# Altium PCB PCB1.PcbDoc (part 3 of 3)
Units mil, origin at the board's own origin, x right, y up, seen from the top; angles counter-clockwise.
Board outline 2860 x 1380 mil, 4 copper layers (L1, L2, L3, L4), stack 61.583 mil thick; 101 components, 94 nets, 397 pads, 115 vias.
Unrouted connection lines stored in the file: 102.
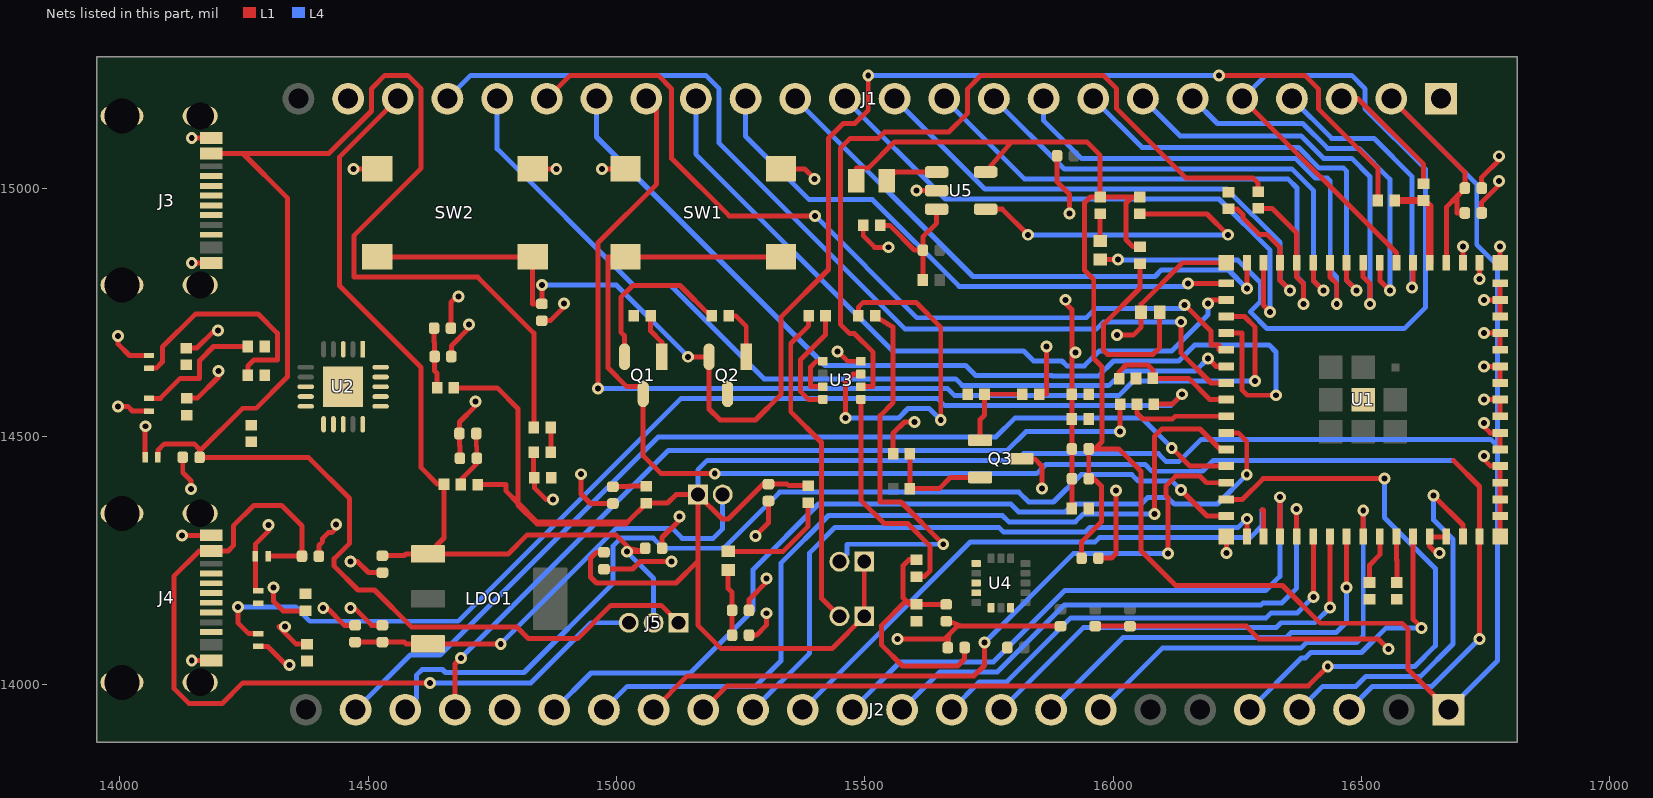
[diagram p4: the nets of this part, all layers, seen from the top]

## Via types
v1: diameter 24, hole 12, L1 to L4, 114 vias
v2: diameter 24/24 (per signal layer), hole 12, L1 to L4, 1 vias

## Nets (pads, with @x,y where several pads share a name; then routed paths per layer and width w, separated by ;. In a path a pad name is that pad's centre, name@x,y a point inside that pad or via, vN(x,y) a via of type N, cw(c..) or ccw(c..) an arc to the next point about the centre after c; other vN are vias at no path point) (continued)
+3V3: C4.2 C5.2 C10.2 C11.2 C28.2 C29.2 C30.2 H1.1 H2.1 H3.1 J1.2 J2.1 L1.1 R2.2 R3.2 R20.1 R25.2 R26.2 R27.2 R32.2 U1.3 U5.5 | length 8746.2
  L1 w10: R3.2@14673.02,14598 14760,14598 14802,14556 14802,14366 ; R2.2@14721,14403 14778,14403 14778,14390 14802,14366 ; C4.2@14975,14266.93 14960,14266.93 14948,14254.93 14948,14217 14960,14205 15120,14205 15164,14249 ; R27.2@15386.07,14401.01 15346.99,14401.01 15344,14404 C5.2@15306.07,14404 15295,14404 15225,14334 15213,14334 H1.1@15164,14383 ; L1.1@15482.98,15015.01 15482.98,15040 15507,15040 15560,15093 15796,15093 ; H2.1@15499,14248 H3.1@15499,14138 15434,14073 15211,14073 15164,14120 15164,14249 ; U5.5@15743.41,15032.41 15796,15093 ; C28.2@15936.56,14255.01 15936.56,14287.92 15976.64,14328 15976.64,14400 15961.63,14415.01 C29.2@15950.93,14415.01 C30.2@15950.93,14475.01 15963.01,14475.01 ; R32.2@16053.49,14982.02 16038.02,14982.02 ; R25.2@16054,14882.02 16040,14882.02 16026,14896.02 16026,14970 16038.02,14982.02 ; J1.2@16560,15180 16708.07,15031.93 C10.2@16708.07,15000 16708.07,14998.82 16692.21,14982.96 ; U1.3@16670.73,14849.73 16670.73,14961.48 16692.21,14982.96 ; J2.1@16675,13950 16594,14031 16594,14112 16582,14124 16417,14124 16341,14200 16126,14200 16056,14270 16056,14430 16010.99,14475.01 15963.01,14475.01 ; C11.2@16708.07,14950 16692.21,14950 16692.21,14982.96 ; 14802,14366 14840,14328 15023,14328 ; 14802,14366 14802,14362 14840,14324 15019,14324 15023,14328 ; 15023,14328 15060,14365 R20.1@15060,14365.99 15103,14365.99 15120.01,14383 H1.1@15164,14383 ; 15164,14249 H1.1@15164,14383 ; 15796,15093 15947,15093 15974,15066 R26.2@15974,14982.02 ; 15963.01,14475.01 15978,14490 15978,14639.89 15961,14656.89 15961,14816 15942,14835 15942,14970 15954.02,14982.02 R26.2@15974,14982.02 ; R26.2@15974,14982.02 16038.02,14982.02
  L4 w10: H1.1@15164,14383 15164,14433 15183,14452 15806,14452 15819.25,14465.25 16091,14465.25 16106.25,14450 16133.08,14450 16177.36,14494.28 16760,14494.28 16774,14480.28 ; J1.2@16560,15180 16732,15008 16732,14886 16774,14844 16774,14480.28 ; J2.1@16675,13950 16774,14049 16774,14480.28
"+3V3 FTDI": C6.2 C7.2 R3.1 R6.2 U2.10 U2.20 | length 122.5
  L1 w10: C6.2@14633.07,14718 14633.07,14690 14634.07,14689 C7.2@14634.07,14661 14634.07,14631.93 14639,14627 R3.1@14639,14598
+3V3-REG: C13.2 C14.2 H1.2 LDO1.3 | length 923.1
  L1 w10: C14.2@14474,14086.07 C13.2@14529,14086.07 14573,14086.07 14576.62,14082.45 LDO1.3@14620.97,14082.45 v1(14767.25,14082.45)
  L4 w10: v1(14767.25,14082.45) 15000,14315.2 15112.27,14315.2 15132.46,14295 15195,14295 15214,14314 H1.2@15214,14383
+5V: C8.2 C12.1 J1.22 J5.2 LDO1.1 R1.2 | length 1840.6
  L1 w10: C12.1@14529,14259.93 14573,14259.93 14576.62,14263.55 LDO1.1@14620.97,14263.55 ; J1.22@14560,15180 14443,15063 14443,14802.85 14607,14638.85 14607,14437 14640,14404 R1.2@14652.99,14404 14652.99,14295.58 LDO1.1@14620.97,14263.55 ; v1(15021,14268) C8.2@15058.07,14268 ; C8.2@15058.07,14275 C8.2@15058.07,14268 ; LDO1.1@14620.97,14263.55 14782,14263.55 14820.45,14302 14999,14302 15026,14275 15056.61,14268.32 C8.2@15058.07,14268
  L4 w10: v1(15021,14268) 15075,14214 J5.2@15075,14125
"+5V VBUS1": C3.2 D1.1 J3.A4B9 J5.1 R10.2 | length 3689.1
  L1 w10: D1.1@14076.8,14458 14076.8,14471.8 14090,14485 14150,14485 14160.93,14474.07 14160.93,14469.93 ; J3.A4B9@14184.84,15069.49 14248.51,15069.49 ; R10.2@14833.99,14518 14833.99,14708.01 14721.17,14820.83 14472,14820.83 14472,14905 14607,15040 14607,15200 14580,15227 14534,15227 14507,15200 14507,15155.29 14421.2,15069.49 14248.51,15069.49 ; J5.1@15125,14125 15090,14160 14989,14160 14922,14093 14823.02,14093 14800.02,14116 14588,14116 14513,14191 14480,14191 14432,14239 14432,14254 14463,14285 14463,14375 14380,14458 C3.2@14160.93,14458 14160.93,14469.93 ; 14160.93,14469.93 14247.79,14556.79 14274.79,14556.79 14337.64,14619.64 14337.64,14980.36 14248.51,15069.49
"+5V VBUS2": C9.2 D4.1 J4.A4B9 J5.3 | length 1708.6
  L1 w10: D4.1@14298.8,14259 C9.2@14367.07,14259 14367.07,14320 14326.07,14361 14270,14361 14229,14320 14229,14280 14218.49,14269.49 J4.A4B9@14184.84,14269.49 14160,14269.49 14109,14218.49 14109,13993 14140,13962 14206,13962 14248,14004 v1(14625,14004)
  L4 w10: v1(14625,14004) 14828,14004 14949,14125 J5.3@15025,14125
BOT_GPIO0: C16.2 Q2.2 R19.1 SW2.1 SW2.2 | length 3061.6
  L1 w10: SW2.2@14518.5,14861.42 SW2.1@14831.5,14861.42 14831.5,14766.93 C16.2@14850,14766.93 v1(14850,14805) ; v1(15144.58,14660.42) Q2.2@15186.6,14660.42 15186.6,14555.4 15209,14533 15280,14533 15331,14584 15331,14740 15427,14836 15427,15100 15457,15130 15480,15130 15507,15157 v1(15507,15227) ; v1(16213,15227) 16386,15227 16413,15200 16413,15160 16532.99,15040.01 R19.1@16532.99,14975
  L4 w10: v1(14850,14805) 15000,14805 v1(15144.58,14660.42) ; v1(15507,15227) v1(16213,15227)
CHIP_PU: J2.3 Q1.3 SW1.1 SW1.2 U1.45 | length 3169.8
  L1 w10: v1(15198,14425) 15090,14425 15054,14461 Q1.3@15054,14585.58 15054,14601 15020,14601 14983,14638 14983,14861.42 SW1.2@15018.5,14861.42 SW1.1@15331.5,14861.42 ; 16685,14452 16737.66,14399.34 U1.45@16737.66,14298.55 v1(16737.66,14092.66)
  L4 w10: v1(15198,14425) 15846,14425 15865,14444 16064,14444 16078,14430 16180,14430 16202,14452 16685,14452 ; J2.3@16475,13950 16522,13997 16642,13997 v1(16737.66,14092.66)
"CON1 USB N": D2.1 J3.A7 J3.B7 R4.1 | length 475.4
  L1 w10: D2.1@14059,14637.41 14073.41,14637.41 14086,14650 14086,14680 14153,14747 14278.64,14747 14317.64,14708 14317.64,14654 14270,14654 14257.99,14641.99 R4.1@14257.99,14623
"CON1 USB P": D3.1 J3.A6 J3.B6 R5.1 | length 263.2
  L1 w10: D3.1@14059,14576.8 14082,14576.8 14122.2,14617 14161,14617 14161,14653 14189,14681 R5.1@14257.99,14681
"CON2 USB N": D5.1 J4.A7 J4.B7 R21.2
"CON2 USB P": D6.1 J4.A6 J4.B6 R22.2 | length 2261.3
  L1 w10: v1(14238,14157) 14238,14125 14260,14103 D6.1@14279,14103 ; R22.2@16082,14565 16119,14565 v1(16139,14585)
  L4 w10: v1(14238,14157) 14354,14157 14383,14128 14681.51,14128 15129.66,14576.15 15647,14576.15 15661,14562.15 16116.15,14562.15 v1(16139,14585)
"CON ESP USB N": J2.20 R23.2
"CON ESP USB P": J2.21 R24.2 | length 1679.9
  L1 w10: J2.21@14675,13950 14675,14042 v1(14687,14054) ; v1(16014,14510) R24.2@16014,14565
  L4 w10: v1(14687,14054) 15105,14472 15787,14472 15825,14510 v1(16014,14510)
CONN_GPIO0: J1.3 R17.1 | length 258.7
  L1 w10: J1.3@16460,15180 16493,15180 16625,15048 R17.1@16625,15009.02
CS: R28.2 U3.2 | length 715.1
  L1 w10: v1(15461,14537) 15461,14610 15476.8,14625.8 U3.2@15492.19,14625.8 ; R28.2@15486.99,14743 15486.99,14760 15496.99,14770 15603,14770 15653,14720 v1(15653,14533)
  L4 w10: v1(15461,14537) 15568,14537 15587.15,14556.15 15629.85,14556.15 v1(15653,14533)
"DTR FTDI": R14.1 U2.18
"ESP USB N": R21.1 R23.1 U1.23 | length 274.5
  L1 w10: R23.1@16012,14616 16012,14630 16026,14644 16070,14644 16080.01,14633.99 R21.1@16080.01,14617 16152,14617 16194.86,14574.14 U1.23@16227.82,14574.14
"ESP USB P": R22.1 R24.1 U1.24 | length 205.1
  L1 w10: R24.1@16048.02,14565 16048.02,14546.98 16060,14535 16119.28,14535 16124.96,14540.68 U1.24@16227.82,14540.68
"FTDI USB N": R4.2 U2.9
"FTDI USB P": R5.2 U2.8
GND: C1.2 C2.1 C3.1 C4.1 C5.1 C6.1 C7.1 C8.1 C9.1 C10.1 C11.1 C12.2 C13.1 C14.1 C15.1 C16.1 C17.1 C18.1 C19.1 C20.1 C21.1 C22.1 C23.1 C25.1 C27.1 C28.1 C29.1 C30.1 D1.2 D2.2 D3.2 D4.2 D5.2 D6.2 D7.1 J1.1 J1.23 J3.A1B12 J3.B1A12 J3.S1 J3.S2 J3.S3 J3.S4 J4.A1B12 J4.B1A12 J4.S1 J4.S2 J4.S3 J4.S4 Q3.3 R7.1 R8.2 R9.2 R11.2 R12.2 R13.2 R34.1 R37.1 R39.1 R41.1 R42.1 R43.1 SW1.3 SW1.4 SW2.3 SW2.4 U1.1 U1.2 U1.42 U1.43 U1.46 U1.47 U1.48 U1.49 U1.50 U1.51 U1.52 U1.53 U1.54 U1.55 U1.56 U1.57 U1.58 U1.59 U1.60 U1.61 U1.62 U1.63 U1.64 U1.65 U2.3 U2.13 U2.21 U3.1 U4.6 U4.8 U5.2 | length 6215.5
  L1 w10: v1(13996.44,14560) 14017.13,14560 14025.93,14551.2 D3.2@14059,14551.2 ; v1(13996.44,14702.21) 13996.44,14686.56 14020,14663 D2.2@14059,14663 ; D1.2@14051.2,14458 14051.2,14520.56 v1(14052,14520.56) ; v1(14125.2,14300.98) J4.A1B12@14184.84,14300.98 ; C3.1@14127.07,14458 14127.07,14427.42 14144,14410.49 v1(14144,14393.86) ; R9.2@14134,14678 14155.55,14678 14190.54,14712.99 v1(14198.14,14712.99) ; R8.2@14135,14577.01 14156.55,14577.01 14199.14,14619.6 v1(14199.14,14632) ; v1(14145.2,14049.02) J4.B1A12@14184.84,14049.02 ; v1(14145.2,14849.02) J3.B1A12@14184.84,14849.02 ; v1(14145.2,15100.98) J3.A1B12@14184.84,15100.98 ; D6.2@14279,14077.41 14297.77,14077.41 14335.18,14040 v1(14341.56,14040) ; D5.2@14279,14189.59 14273.2,14189.59 D4.2@14273.2,14259 14273.2,14283.07 14300,14309.87 v1(14300,14321.56) ; v1(14309.86,14196) 14309.86,14168.08 14328.95,14148.99 R13.2@14374,14148.99 ; v1(14332.86,14117) 14320.46,14117 14355.45,14082.01 R12.2@14377,14082.01 ; C9.1@14400.93,14259 14400.93,14280.51 14408.68,14288.26 14408.68,14294.97 14420,14306.29 14426.71,14306.29 14436,14315.58 v1(14436,14323.14) ; v1(14409.86,14155) 14417.42,14155 14452.49,14119.93 C14.1@14474,14119.93 ; v1(14464.86,14155) 14472.42,14155 14507.49,14119.93 C13.1@14529,14119.93 ; v1(14464.86,14248) 14478.99,14248 14500.92,14226.07 C12.2@14529,14226.07 ; v1(14470.99,15038.58) SW2.4@14518.5,15038.58 ; C6.1@14666.93,14718 14666.93,14770 14679.07,14782.14 v1(14682,14782.14) ; C7.1@14667.93,14661 14667.93,14682.51 14703,14717.58 v1(14703,14725.14) ; C2.1@14685.07,14456 14685.07,14480.93 14684.07,14481.93 C1.2@14684.07,14506 14684.07,14529.08 14716,14561.01 v1(14716,14570.14) ; SW2.3@14831.5,15038.58 v1(14879.01,15038.58) ; R11.2@14833.99,14468 14833,14468 14833,14417 R7.1@14834.99,14417 14834.99,14396.46 14858.59,14372.86 v1(14872,14372.86) ; C16.1@14850,14733.07 14867.21,14733.07 14894.14,14760 v1(14894.14,14768) ; v1(14928.86,14424) 14928.86,14384.16 14947.95,14365.07 C15.1@14993,14365.07 ; v1(14970.99,15038.58) SW1.4@15018.5,15038.58 ; C4.1@14975,14233.07 15032.58,14233.07 15047.51,14248 v1(15111.14,14248) ; C8.1@15091.93,14275 15091.93,14296.51 15127,14331.58 v1(15127,14339.14) ; C18.1@15266.93,14100 15282,14100 15302,14120 v1(15302,14144.14) ; C17.1@15266.93,14150 15266.93,14171.51 15302,14206.58 v1(15302,14214.14) ; v1(15280,14300) 15306.07,14326.07 C5.1@15306.07,14370.14 ; SW1.3@15331.5,15038.58 15379.01,15038.58 v1(15399.01,15018.58) ; v1(15445.54,14671.39) 15465.54,14651.39 U3.1@15492.19,14651.39 ; R34.1@15496.99,14925.01 15496.99,14903.88 15520,14880.87 v1(15548,14880.87) ; R42.1@15556.99,14465.01 15556.99,14506.14 15580,14529.15 v1(15600,14529.15) ; v1(15565.86,14092) 15659.92,14092 15670.07,14102.15 ; v1(15603.77,14995.01) U5.2@15644.59,14995.01 ; C19.1@15664,14128.08 15670.07,14128.08 15696,14118.08 ; C20.1@15667.07,14075.01 15670.07,14102.15 ; Q3.3@15815.73,14455.01 15841.94,14455.01 15856.95,14440 v1(15856.95,14395.01) ; R43.1@15851.01,14585.01 15866,14585.01 v1(15866,14681.15) ; C22.1@15887.07,15065.01 15887.07,15012.43 15912,14987.5 v1(15912,14948.87) ; C23.1@15894,14118.08 15696,14118.08 ; v1(15904,14775.15) 15904,14768.22 15917.07,14755.15 v1@15917.07,14662.22 ; R37.1@15916.99,14355.01 R37.1@15917.07,14355.01 ; R39.1@15916.99,14535.01 15916.99,14513.01 15917.07,14512.93 ; R41.1@15916.99,14585.01 15916.99,14662.14 v1@15917.07,14662.22 ; C29.1@15917.07,14415.01 R37.1@15917.07,14355.01 ; v1(15924,14669.15) v1@15917.07,14662.22 ; C25.1@15964,14118.08 C27.1@16034,14118.08 16268.01,14118.08 16294.08,14092 16534.14,14092 v1(16554.14,14072) ; C28.1@15970.42,14255.01 15996.64,14255.01 16005.49,14263.86 v1(16005.49,14391.15) ; v1(16008,14703.89) 16040.19,14703.89 16056.3,14720 D7.1@16056.3,14750 16056.3,14766.3 16139.73,14849.73 U1.63@16227.82,14849.73 ; v1(16227.82,14265.8) U1.64@16227.82,14298.55 ; U1.42@16637.27,14298.55 U1.42@16637.27,14298 ; v1(16657.27,14265.8) 16650,14265.8 16637.27,14278.54 U1.42@16637.27,14298 ; U1.43@16670.73,14298.55 16670.73,14298 U1.42@16637.27,14298 ; U1.2@16704.2,14849.73 v1(16704.2,14882.48) ; v1(16737.66,14816.98) U1.1@16737.66,14849.73 ; C11.1@16741.93,14950 16741.93,14971.51 16777,15006.58 v1(16777,15014.14) ; C10.1@16741.93,15000 16741.93,15021.51 16777,15056.58 v1(16777,15064.14) ; v1(16746.25,14460.28) 16746.25,14454.03 16760,14440.28 U1.49@16779,14440.28 U1.48@16779,14406.82 U1.47@16779,14373.35 U1.46@16779,14339.89 U1.65@16779,14298.55 ; v1(16746.25,14527.21) 16746.25,14520 16759.04,14507.21 U1.51@16779,14507.21 U1.50@16779,14473.75 ; v1(16746.25,14574.14) U1.53@16779,14574.14 U1.52@16779,14540.68 ; v1(16746.25,14641.07) U1.55@16779,14641.07 U1.54@16779,14607.61 ; v1(16746.25,14708) U1.57@16779,14708 U1.56@16779,14674.54 ; v1(16746.25,14774.93) U1.59@16779,14774.93 ; U1.58@16779,14741.46 U1.59@16779,14774.93 ; U1.60@16779,14808.39 U1.59@16779,14774.93 ; U1.62@16779,14849.73 v1(16779,14882.48) ; 15670.07,14102.15 15685.99,14118.08 15696,14118.08 ; R37.1@15917.07,14355.01 15917.68,14355.01 15917.68,14415.4 15917.07,14416.01 C30.1@15917.07,14475.01 15917.07,14512.93 ; 15917.07,14512.93 v1@15917.07,14662.22
GPIO0: R17.2 R19.2 U1.4 | length 189
  L1 w15: R19.2@16567.01,14975 R17.2@16625,14975 16626.18,14975 16637.27,14963.91 U1.4@16637.27,14849.73
GPIO1: J1.4 U1.5 | length 580.1
  L1 w10: v1(16602,14800.22) 16603.8,14802.02 U1.5@16603.8,14849.73
  L4 w10: J1.4@16360,15180 16440,15100 16525,15100 16602,15023 v1(16602,14800.22)
GPIO2: J1.5 LED1.1 U1.6 | length 2020.7
  L1 w10: LED1.1@15974,14856.31 v1(16009.69,14856.31) ; J1.5@16260,15180 16570.34,14869.66 U1.6@16570.34,14849.73
  L4 w10: v1(16009.69,14856.31) 16011,14855 16251.16,14855 16296.16,14810 16296.16,14771 16276,14750.84 16309.84,14717 16586,14717 16629,14760 16629,15038 16507,15160 16507,15200 16480,15227 16307,15227 J1.5@16260,15180
GPIO3: J1.6 U1.7 | length 752.2
  L1 w10: U1.7@16536.87,14849.73 16536.87,14814.13 v1(16557,14794)
  L4 w10: J1.6@16160,15180 16210,15130 16381.72,15130 16431.72,15080 16495,15080 16557,15018 v1(16557,14794)
GPIO4: J1.7 U1.8 | length 866.5
  L1 w10: U1.8@16503.41,14849.73 16503.41,14821 16517.07,14807.34 v1(16517.07,14767)
  L4 w10: J1.7@16060,15180 16135,15105 16378.43,15105 16423.43,15060 16480,15060 16517.07,15022.93 v1(16517.07,14767)
GPIO5: J1.8 U1.9 | length 883
  L1 w10: U1.9@16469.94,14849.73 16469.94,14814.13 v1(16490.07,14794)
  L4 w10: J1.8@15960,15180 16058,15082 16373.15,15082 16415.15,15040 16464.21,15040 16470.07,15034.14 16470.07,14841.07 16470.14,14841 16470.14,14813.93 v1(16490.07,14794)
GPIO6: J1.9 U1.10 | length 1012.6
  L1 w10: U1.10@16436.48,14849.73 16436.48,14821 16450.14,14807.34 v1(16450.14,14767)
  L4 w10: J1.9@15860,15180 15860,15135.86 15935.86,15060 16366.86,15060 16406.86,15020 16431.21,15020 16437.07,15014.14 16437.07,14834.07 16450.14,14821 v1(16450.14,14767)
GPIO7: J1.10 U1.11 | length 993.4
  L1 w10: U1.11@16403.02,14849.73 16403.02,14814.13 v1(16423.14,14794)
  L4 w10: J1.10@15760,15180 15902,15038 16360.58,15038 16403.14,14995.44 16403.14,14814 v1(16423.14,14794)
GPIO8: J1.11 R35.1 U1.12 | length 1269.4
  L1 w10: R35.1@16292,14958.99 16320,14958.99 16369.55,14909.44 U1.12@16369.55,14849.73 16369.55,14821 16383.21,14807.34 v1(16383.21,14767)
  L4 w10: J1.11@15660,15180 15822,15018 16352.29,15018 16370.14,15000.15 16370.14,14821 16383.21,14807.93 v1(16383.21,14767)
GPIO9: J1.12 R36.1 U1.13 | length 1235.9
  L1 w10: R36.1@16232,14957.99 16250,14957.99 16261,14946.99 16261,14940 16294,14907 16309.09,14907 16336.09,14880 U1.13@16336.09,14849.73 16336.09,14814.13 v1(16356.21,14794)
  L4 w10: J1.12@15560,15180 15742,14998 16229,14998 16336.21,14890.79 16336.21,14814 v1(16356.21,14794)
GPIO10: J1.13 U1.14 | length 1211.6
  L1 w10: U1.14@16302.62,14849.73 16302.62,14764.13 v1(16316.16,14750.59)
  L4 w10: J1.13@15460,15180 15662,14978 16213,14978 16316.16,14874.84 v1(16316.16,14750.59)
GPIO11: J1.14 U1.15 | length 1129.8
  L1 w10: v1(16269.16,14797.95) U1.15@16269.16,14849.73
  L4 w10: J1.14@15360,15180 15717.85,14822.15 16084.15,14822.15 16097,14835 16232.11,14835 v1(16269.16,14797.95)
GPIO12: J1.15 U1.16 | length 1171.1
  L1 w10: v1(16151,14808) 16151.39,14808.39 U1.16@16227.82,14808.39
  L4 w10: J1.15@15260,15180 15260,15104.57 15388,14976.57 15515.51,14976.57 15689.94,14802.15 16145.15,14802.15 v1(16151,14808)
GPIO13: J1.16 U1.17 | length 1424.5
  L1 w10: v1(16191,14768) 16197.93,14774.93 U1.17@16227.82,14774.93
  L4 w10: J1.16@15160,15180 15160,15068.4 15556.4,14672 15820,14672 15840,14652 15897,14652 15906.85,14642.15 15942.15,14642.15 15972,14672 16118,14672 16191,14745 v1(16191,14768)
GPIO14: J1.17 U1.18 | length 2157.7
  L1 w10: v1(14963,14596.15) 14963,14890 15081,15008 15081,15159 J1.17@15060,15180 ; U1.18@16227.82,14741.46 16264.54,14741.46 16286,14720 v1(16286,14612)
  L4 w10: v1(14963,14596.15) 15667,14596.15 15681,14582.15 16011,14582.15 16040.85,14612 v1(16286,14612)
GPIO15: J1.18 U1.19 | length 1981.3
  L1 w10: U1.19@16227.82,14708 16259,14708 16259,14594 16270,14583 v1(16328,14583)
  L4 w10: J1.18@14960,15180 14960,15103 15420,14643 15703,14643 15723,14623 15877,14623 15877.85,14622.15 15971,14622.15 16000.85,14652 16132,14652 16164,14684 16314,14684 16328,14670 v1(16328,14583)
GPIO16: J1.19 U1.20 | length 1745.8
  L1 w10: J1.19@14860,15180 14907,15227 15084,15227 15111,15200 15111,15060 15227,14944 v1(15400,14944) ; v1(16144,14765) 16197,14712 16197,14684 16213,14684 16213,14674.54 U1.20@16227.82,14674.54
  L4 w10: v1(15400,14944) 15605,14739 15946,14739 15964.89,14757.89 16144,14757.89 v1(16144,14765)
GPIO17: J1.20 U1.21 | length 1795.7
  L1 w10: v1(16191,14657) 16206.93,14641.07 U1.21@16227.82,14641.07
  L4 w10: J1.20@14760,15180 14760,15079 15035,14804 15109.19,14804 15297.04,14616.15 15682.85,14616.15 15696,14603 15857,14603 15857.85,14602.15 15991,14602.15 16020.85,14632 16166,14632 v1(16191,14657)
GPIO18: J1.21 U1.22 | length 1957.3
  L1 w10: v1(16137,14730.89) 16137,14667.61 16197,14607.61 U1.22@16227.82,14607.61
  L4 w10: J1.21@14660,15180 14707,15227 15180,15227 15207,15200 15207,15090.53 15581.39,14716.15 15966.25,14716.15 15981,14730.89 v1(16137,14730.89)
GPIO21: J2.19 U1.25 | length 1777.2
  L1 w10: U1.25@16227.82,14507.21 16251.79,14507.21 16269,14490 v1(16269,14423)
  L4 w10: J2.19@14875,13950 14949,14024 15149,14024 15275,14150 15275,14232 15407,14364 15793.95,14364 15809.95,14348.01 15903.95,14348.01 15919.94,14364 16056.25,14364 16069.12,14376.87 16110.25,14376.87 16123.12,14364 16210,14364 v1(16269,14423)
GPIO26: J2.18 U1.26 | length 1721.5
  L1 w10: v1(16083,14344) 16083,14500 16098,14515 16175,14515 16216.25,14473.75 U1.26@16227.82,14473.75
  L4 w10: J2.18@14975,13950 15022,13997 15280,13997 15331,14048 15331,14245 15427,14341 15776.95,14341 15789.95,14328.01 15923.95,14328.01 15939.94,14344 v1(16083,14344)
GPIO33: J2.17 U1.28 | length 1465.6
  L1 w10: J2.17@15075,13950 15143,14018 15720,14018 15741,14039 v1(15741,14085) ; v1(16110.25,14264) 16110.25,14376.87 16106,14381.12 16106,14400 16126,14420 16174.82,14420 16188,14406.82 U1.28@16227.82,14406.82
  L4 w10: v1(15741,14085) 15920,14264 v1(16110.25,14264)
GPIO34: J2.16 U1.29 | length 2241.2
  L1 w10: J2.16@15175,13950 15222.86,13997.86 16392.86,13997.86 v1(16432,14037) ; U1.29@16227.82,14373.35 16260.35,14373.35 16302,14415 v1(16546,14415)
  L4 w10: v1(16432,14037) 16607,14037 16648.64,14078.64 16648.64,14234.36 16546,14337 v1(16546,14415)
GPIO35: J2.15 U1.31 | length 1314.8
  L1 w10: U1.31@16269.16,14298.55 v1(16269.16,14334.28)
  L4 w10: J2.15@15275,13950 15388.93,14063.93 15388.93,14265.93 15440,14317 15769.95,14317 15778.94,14308.01 15943.95,14308.01 15952.94,14317 16251.87,14317 v1(16269.16,14334.28)
GPIO36: J2.14 U1.32 | length 1165.5
  L1 w10: 16299.82,14351.6 16302.62,14351.6 U1.32@16302.62,14298.55
  L4 w10: J2.14@15375,13950 15713.01,14288.01 15963.95,14288.01 15972.94,14297 16276.82,14297 16299.82,14320 16299.82,14351.6
GPIO37: J2.13 U1.33 | length 1210.3
  L1 w10: v1(16335.5,14377.69) 16336.09,14377.1 U1.33@16336.09,14298.55
  L4 w10: J2.13@15475,13950 15571,14046 15758.72,14046 15902.72,14190 16307,14190 16335.5,14218.5 v1(16335.5,14377.69)
GPIO38: J2.12 U1.34 | length 1111.3
  L1 w10: v1(16369.43,14354.28) 16369.55,14354.16 U1.34@16369.55,14298.55
  L4 w10: J2.12@15575,13950 15651,14026 15767,14026 15902,14161 16298,14161 16302,14165 16340,14165 16369.43,14194.43 v1(16369.43,14354.28)
GPIO39: J2.11 U1.35 | length 943.6
  L1 w10: v1(16403.02,14177.02) U1.35@16403.02,14298.55
  L4 w10: J2.11@15675,13950 15731,14006 15786,14006 15915,14135 16308,14135 16318,14145 16371,14145 v1(16403.02,14177.02)
GPIO40: J2.10 U1.36 | length 889.7
  L1 w10: v1(16436.48,14155.48) U1.36@16436.48,14298.55
  L4 w10: J2.10@15775,13950 15940,14115 16328,14115 16338,14125 16406,14125 v1(16436.48,14155.48)
GPIO41: J2.9 U1.37 | length 840.1
  L1 w10: v1(16469.94,14196.02) U1.37@16469.94,14298.55
  L4 w10: J2.9@15875,13950 16020,14095 16348,14095 16358,14105 16448.48,14105 16469.94,14126.46 v1(16469.94,14196.02)
GPIO42: J2.8 U1.38 | length 895.1
  L1 w10: U1.38@16503.41,14298.55 16503.41,14351.08 v1(16503.48,14351.15)
  L4 w10: J2.8@15975,13950 16099,14074 16378,14074 16389,14085 16489.75,14085 16503.48,14098.73 v1(16503.48,14351.15)
GPIO45: J2.5 U1.41 | length 605.4
  L1 w10: U1.41@16603.8,14298.55 16603.8,14132 v1(16621.14,14114.67)
  L4 w10: J2.5@16275,13950 16379,14054 16387,14054 16398,14065 16500,14065 16549.67,14114.67 v1(16621.14,14114.67)
GPIO46: J2.4 U1.44 | length 786
  L1 w10: v1(16645,14381) 16704.2,14321.8 U1.44@16704.2,14298.55
  L4 w10: J2.4@16375,13950 16422,13997 16489,13997 16509,14017 16619,14017 16684.27,14082.27 16684.27,14293 16645,14332.27 v1(16645,14381)
GPIO47: J2.23 U1.27 | length 2036
  L1 w10: v1(16118,14477) 16154.72,14440.28 U1.27@16227.82,14440.28
  L4 w10: J2.23@14475,13950 14585,14060 14645.1,14060 15084.1,14499 15764,14499 15802,14537 16058,14537 v1(16118,14477)
GPIO48: J2.22 U1.30 | length 1993.2
  L1 w10: v1(16136.75,14392.25) 16189.11,14339.89 U1.30@16227.82,14339.89
  L4 w10: J2.22@14575,13950 14598,13973 14598,14020 14609,14031 14650,14031 14656,14025 14814,14025 14993.51,14204.51 14993.51,14280 15008.71,14295.2 15074.41,14295.2 15094.61,14275 15216,14275 15328.77,14387.77 15810.18,14387.77 15829.95,14368.01 15880.01,14368.01 15935.23,14423.23 16037.77,14423.23 16051,14410 16119,14410 v1(16136.75,14392.25)
NetC1_1: C1.1 C2.2 R1.1 R2.1 U2.12 | length 117.7
  L1 w10: R1.1@14687.01,14404 R2.1@14686.98,14403 14686.98,14413 14718.93,14444.95 C2.2@14718.93,14456 14718.93,14480 14717.93,14481 C1.1@14717.93,14506
NetC15_2: C15.2 R20.2 | length 67.4
  L1 w10: C15.2@14993,14398.93 15025,14398.93 15026.08,14400.01 R20.2@15060,14400.01
NetC17_2: C17.2 C18.2 D8.1 U3.6 U3.8 | length 228.8
  L1 w10: D8.1@15225,14231.3 15225,14194.07 15233.07,14186 C17.2@15233.07,14150 C18.2@15233.07,14100 ; U3.6@15415.81,14600.2 15391,14600.2 15391,14640 15402.39,14651.39 U3.8@15415.81,14651.39
NetC19_2: C19.2 C20.2 R30.2 R31.2 U4.1 | length 534
  L1 w10: R30.2@15604,14252.02 15589.02,14252.02 15577,14240 15577,14175.02 15583.01,14169.01 ; C19.2@15664,14161.94 15633.08,14161.94 15633,14162.02 R31.2@15604,14162.02 ; C20.2@15700.93,14075.01 15700.93,14051.93 15687,14038 15576,14038 15534,14080 15534,14120 15583.01,14169.01 ; 15583.01,14169.01 15590,14162.02 R31.2@15604,14162.02 ; 15583.01,14169.01 R31.2@15604,14162.02
NetC24_1: C24.1 R33.1 R34.2 U5.3 | length 260.8
  L1 w10: R34.2@15531.01,14925.01 15550,14925.01 15600,14875.01 C24.1@15617.07,14875.01 ; R33.1@15616.99,14815.01 15616.99,14844 15617.07,14844.08 C24.1@15617.07,14875.01 ; U5.3@15644.59,14957.61 15644.59,14929.52 15617.07,14902 C24.1@15617.07,14875.01
NetD7_2: D7.2 R25.1 | length 398.2
  L1 w10: R25.1@16054,14848 16054,14799 15981,14726 15981,14673 15989,14665 16080,14665 16093.7,14678.7 D7.2@16093.7,14750
NetD8_2: D8.2 R27.1 | length 229.9
  L1 w10: D8.2@15225,14268.7 15335.7,14268.7 15386.07,14319.07 R27.1@15386.07,14366.99
NetD9_1: L1.2 U5.1 | length 107.8
  L1 w10: L1.2@15544,15015.01 15561.4,15032.41 U5.1@15644.59,15032.41
NetH2_2: H2.2 R28.1 | length 803.4
  L1 w10: R28.1@15521.01,14743 15521.01,14742 15557,14720 15557,14568 15531,14542 15531,14368 15573,14368 v1(15658,14283)
  L4 w10: H2.2@15449,14248 15464,14263 15464,14283 v1(15658,14283)
NetH3_2: H3.2 R29.2 | length 660.5
  L1 w10: R29.2@15386.99,14743 15386.99,14723 15351,14687.01 15351,14550 15413,14488 15413,14174 H3.2@15449,14138
NetJ3_A5: J3.A5 R9.1
NetJ3_B5: J3.B5 R8.1
NetJ4_A5: J4.A5 R13.1
NetJ4_B5: J4.B5 R12.1
NetLED1_2: LED1.2 R26.1 | length 54.3
  L1 w10: LED1.2@15974,14893.71 R26.1@15974,14948
NetQ1_1: Q1.1 R14.2 | length 91.9
  L1 w10: R14.2@15069,14743 15069,14712.4 15091.4,14690 Q1.1@15091.4,14660.42
NetQ1_2: Q1.2 R15.1 | length 340.9
  L1 w10: Q1.2@15016.6,14660.42 15016.6,14702.4 15009,14710 15009,14780 15033,14804 15128,14804 15189,14743 R15.1@15191.99,14743
NetQ2_1: Q2.1 R15.2 | length 105.4
  L1 w10: R15.2@15226.01,14743 15240,14743 15261.4,14721.6 Q2.1@15261.4,14660.42
NetQ3_1: Q3.1 R38.1 R43.2 | length 172.2
  L1 w10: Q3.1@15732.27,14492.41 15732.27,14534 15741.01,14542.74 R38.1@15741.01,14585.01 R43.2@15816.99,14585.01
NetQ3_2: Q3.2 R40.1 R42.2 | length 220.6
  L1 w10: R42.2@15591.01,14465.01 R40.1@15591.01,14395.01 15650,14395.01 15672.6,14417.61 Q3.2@15732.27,14417.61
NetR6_1: R6.1 U2.11
NetR7_2: R7.2 U2.15
NetR32_1: R32.1 U5.4 | length 703.9
  L1 w10: U5.4@15743.41,14957.61 15777,14957.61 v1(15828.61,14906) ; R32.1@16053.49,14948 16189,14948 v1(16231,14906)
  L4 w10: v1(15828.61,14906) v1(16231,14906)
NetR37_2: R37.2
NetR38_2: R38.2
NetR39_2: R39.2
NetR41_2: R41.2
"RTS FTDI": Q2.3 U2.19
"RXD FTDI": R16.1 U2.1
SCK/SCL: R30.1 R36.2 U3.4 U4.3 | length 462.3
  L1 w10: U3.4@15492.19,14574.61 15492.19,14371.58 15538.77,14325 15586,14325 15631,14280 15631,14229 15620,14218 R30.1@15604,14218
SDI/SDA: R31.1 R35.2 U3.3 U4.4 | length 1598.1
  L1 w10: U3.3@15492.19,14600.2 15516.84,14600.2 15516.84,14669.52 15479.35,14707 15470,14707 15451,14726 15451,15080 15471,15100 15527,15100 15540,15113 15669,15113 15707,15151 15707,15200 15734,15227 15980,15227 16007,15200 16007,15160 16147,15020 16282,15020 16292,15010 R35.2@16292,14993.01
SDO/ADR: R29.1 U3.5 | length 224.9
  L1 w10: U3.5@15415.81,14574.61 15386.39,14574.61 15371,14590 15371,14655 15421.01,14705.01 R29.1@15421.01,14743
"TXD FTDI": R18.1 U2.17
U0RXD: R18.2 U1.40 | length 92.8
  L1 w10: U1.40@16570.34,14298.55 16570.34,14251.66 16571,14251 R18.2@16571,14206.01
U0TXD: R16.2 U1.39 | length 101.2
  L1 w10: R16.2@16516,14206.01 16516,14241 16536.87,14261.87 U1.39@16536.87,14298.55
"VBUS SENSE": R10.1 R11.1 U2.16 | length 50
  L1 w10: R11.1@14868.01,14468 R10.1@14868.01,14518
pads on no net: J1.24 J2.2 J2.6 J2.7 J2.24 J3.A8 J3.B4A9 J3.B8 J4.A8 J4.B4A9 J4.B8 LDO1.2 LDO1.4 R40.2 U1.61_1 U1.61_2 U1.61_3 U1.61_4 U1.61_5 U1.61_6 U1.61_7 U1.61_8 U2.2 U2.4 U2.5 U2.6 U2.7 U2.14 U3.7 U4.2 U4.5 U4.7 U4.9 U4.11 U4.12 U4.13 U4.14 U4.15 U4.16
copper on no net: | length 144.4
  L4 w10: v2(16370,14545) 16479,14545 16504,14570

## Polygon pours and split planes (outlines as drawn)
no net on L2 (split plane): 16793.9,13904.1 13974.1,13904.1 13974.1,15243.9 16793.9,15243.9
GND on L3 (split plane): 16793.9,13904.1 13974.1,13904.1 13974.1,15243.9 16793.9,15243.9

## Text inside footprints (layer, text, board x,y; h text height)
J1: Bottom Overlay "1" at 16641,15086 h40 r270
J2: Bottom Overlay "1" at 16656,13856 h40 r270
J5: Top Overlay "1" at 15111,14204 h40 r270